# Altium PCB FT232B.PcbDoc
Units mm, origin at the board's own origin, x right, y up, seen from the top; angles counter-clockwise.
Board outline 24.13 x 41.15 mm, 2 copper layers (Top Layer, Bottom Layer); 21 components, 20 nets, 85 pads, 0 vias.
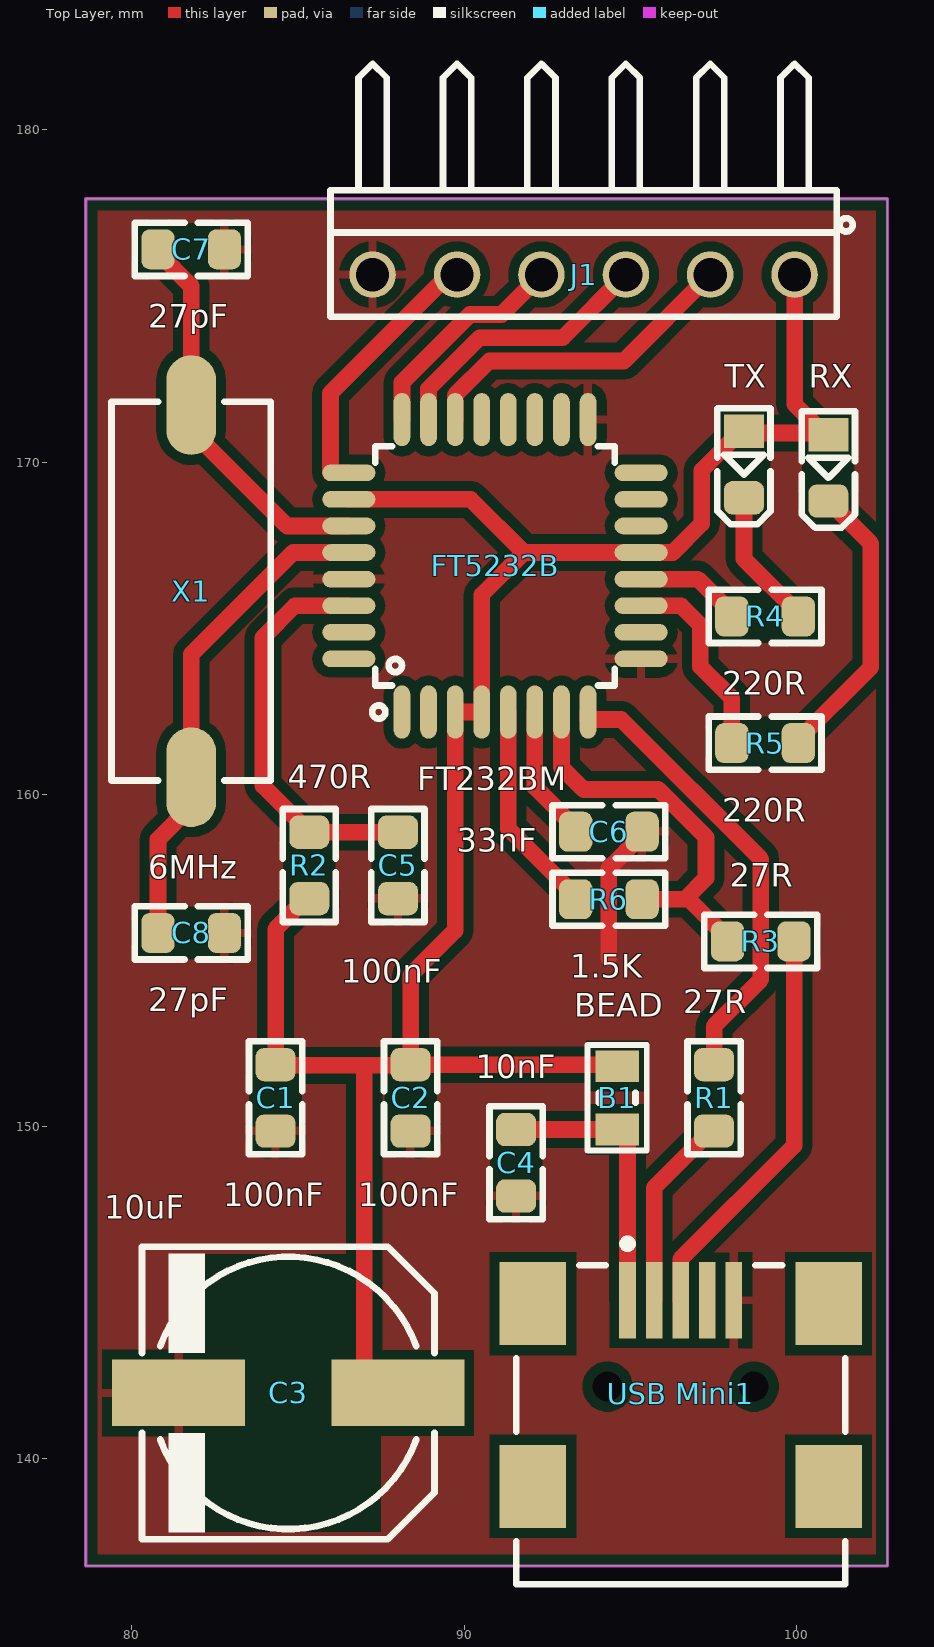
[diagram p0: Top Layer view]
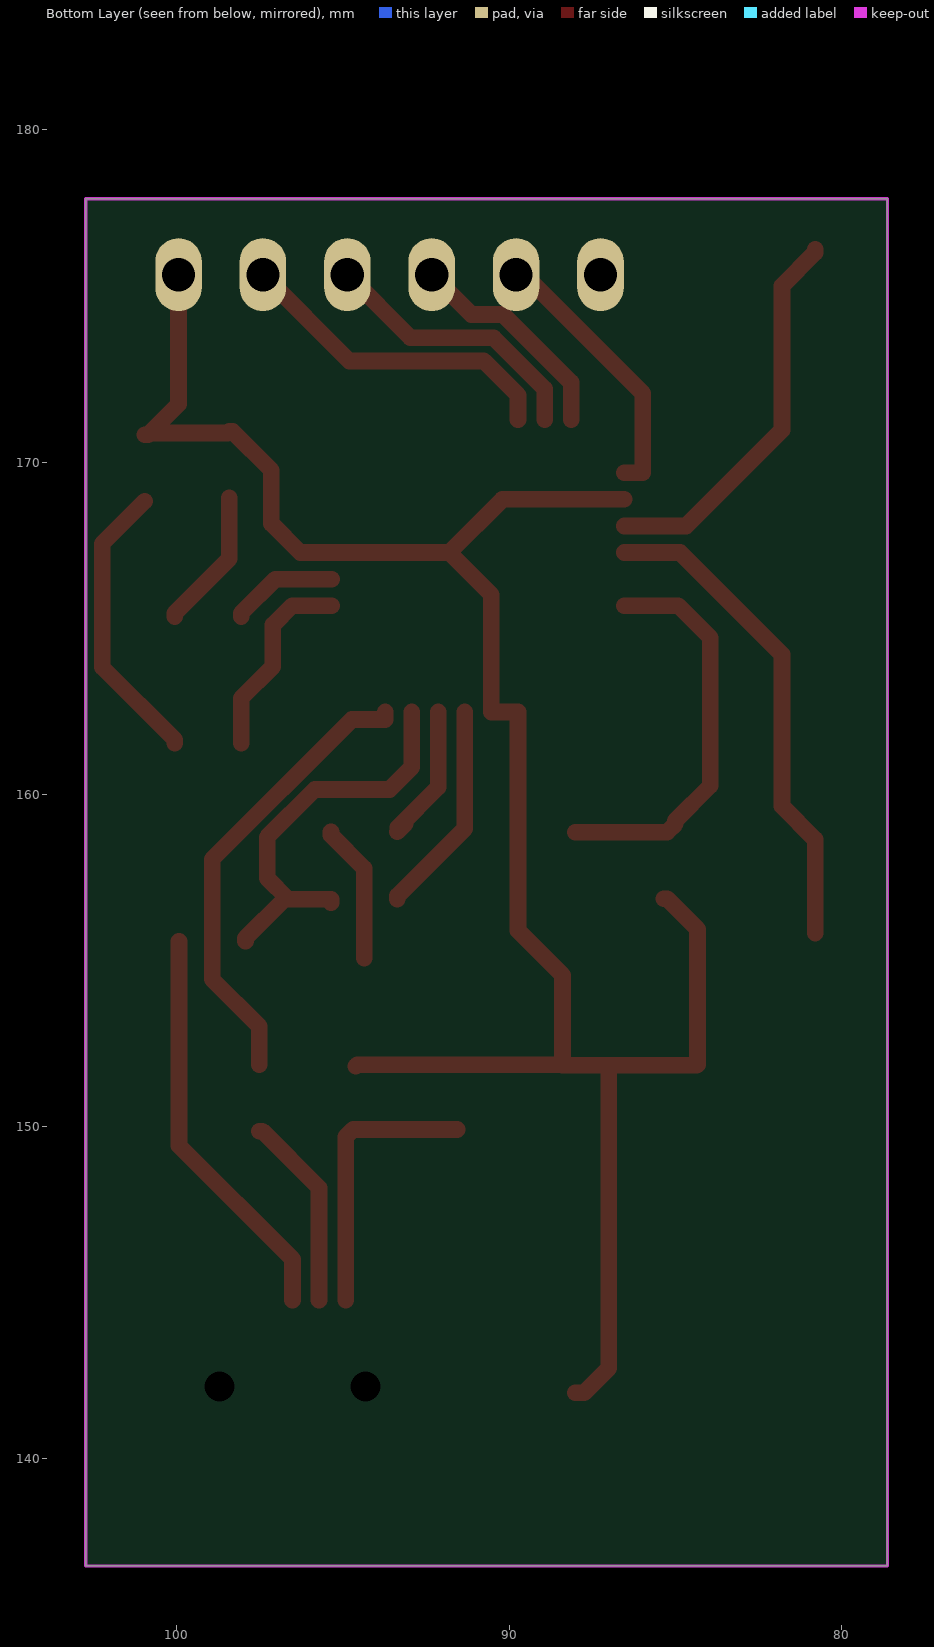
[diagram p1: Bottom Layer view, seen from below]

## Layer stack, top to bottom
Top Solder: solder mask 0.0102, Solder Resist, Dk 3.5
Top Layer: signal copper 0.0356
Dielectric 1: dielectric 0.32, FR-4, Dk 4.8
Bottom Layer: signal copper 0.0356
Bottom Solder: solder mask 0.0102, Solder Resist, Dk 3.5

## Board outline
78.613,136.779 78.613,177.927 102.743,177.927 102.743,136.779

## Design rules (kind name [scope] priority, off if disabled: settings)
Clearance Clearance_1 [InNamedPolygon('GND_L01_P000')] p1: gap=0.3 ignorepadtopadclearanceinfootprint=FALSE
Clearance [All] p2: gap=0.2 ignorepadtopadclearanceinfootprint=FALSE
PolygonConnect PolygonConnect_1 [All vs IsNamedPolygon('GND_L01_P000')] p1: connectstyle=Relief reliefconductorwidth=0.254 reliefentries=4 polygonreliefangle="90 Angle" airgapwidth=0.3
PolygonConnect [All] p2: connectstyle=Relief reliefconductorwidth=0.254 reliefentries=4 polygonreliefangle="90 Angle" airgapwidth=0.254
RoutingVias [All] p1: holewidth=0.711 width=1.27 viastyle="Through Hole" minholewidth=0.711 minwidth=1.27 maxholewidth=0.711 maxwidth=1.27
SolderMaskExpansion [All] p1: expansion=0.102 istentingtop=FALSE
Width [All] p1: maxlimit=1 minlimit=0.3 preferedwidth=0.5 minimp=50.000000 maximp=50.000000 favimp=50.000000
30 further rules are at their usual default settings.

## Components (designator, comment, footprint, x,y, rotation, side; value= is the part's Value field where it differs from the comment)
B1 "BEAD" "RES 0805 (2012X06L)" 94.61,150.04 r90 top
C1 "100nF" C0805 84.328,150.866 r270 top
C2 "100nF" C0805 88.392,150.866 r270 top
C3 "10uF" C_EL_8 84.709,141.986 r180 top
C4 "10nF" C0805 91.567,148.913 r90 top
C5 "100nF" C0805 88.011,157.861 r90 top
C6 "33nF" C0805 94.361,158.877 r0 top
C7 "27pF" C0805 81.788,176.403 r180 top
C8 "27pF" C0805 81.788,155.829 r180 top
FT5232B "FT232BM" QFG80_32 90.932,166.878 r90 top
J1 "HDR1X6" HDRR_M_1X6 93.599,175.641 r180 top value=HDRM6
R1 "27R" R0805 97.525,150.866 r270 top
R2 "470R" R0805 85.344,157.861 r270 top
R3 "27R" R0805 98.933,155.575 r0 top
R4 "220R" R0805 99.06,165.354 r0 top
R5 "220R" R0805 99.06,161.544 r0 top
R6 "1.5K" R0805 94.361,156.845 r0 top
RX "LED805BLU" LED0805BLU 100.965,169.826 r270 top
TX "LED805RED" LED0805RED 98.425,169.926 r270 top
"USB Mini1" "USB_Mini" USB_Mini.2 96.52,141.976 r270 top
X1 "6MHz" XTL_2_11X5 81.788,166.116 r90 top

## Footprints (in the part's own frame and the unit in brackets; to place one, negate y for a bottom-side part, rotate by r counter-clockwise, add the part's x,y. Pads: shape width x height; smd on the part's side, far side on the other; paste and mask are expansions set on the pad)
C0805 [mm] "CHIP Capacitor, 2.0X1.3mm, 0805"
  rrect50% 1x1.2 smd paste-5 mask+0.075: 1(-1,0) 2(1,0)
  Top Layer pour cut-out: -0.5,0.8 0.5,0.8 0.5,-0.8 -0.5,-0.8
  silkscreen extent -1.7,-0.8 1.7,0.8, body extent -1,-0.62 1,0.63, height 1
C_EL_8 [mm] "Electrolytic Cap, Size E, Size F, 8.3X10"
  rect 4x2 smd: 1(-3.3,0) 2(3.3,0)
  Top Layer pour cut-out: 2.794,4.191 2.794,-4.191 -2.794,-4.191 -2.794,4.191
  silkscreen extent -4.4,-4.4 4.4,4.4, body extent -4.9,-4.25 4.8,4.25, height 10.3
HDRR_M_1X6 [mm] "Connector; Header; 6 Position"
  round 1.4 / inner round 1.4 / far side oval 1.4x2.2 hole 1 mask+0.1: 1(-6.35,0) 2(-3.81,0) 3(-1.27,0) 4(1.27,0) 5(3.81,0) 6(6.35,0)
  silkscreen extent -8.1,-6.35 7.62,1.27, body extent -7.62,-7.35 7.62,1.27, height 5.45
LED0805BLU [mm] "LED SMD 0805, BLUE"
  rect 1x1.2 smd paste-2 mask+0.075: 1(-1,0)
  rrect50% 1x1.2 smd paste-2 mask+0.075: 2(1,0)
  Top Layer pour cut-out: -0.5,0.8 0.5,0.8 0.5,-0.8 -0.5,-0.8
  silkscreen extent -1.7,-0.8 1.8,0.8, body extent -1,-0.63 1,0.63, height 0.7
LED0805RED [mm] "LED SMD 0805, RED"
  rect 1x1.2 smd paste-2 mask+0.075: 1(-1,0)
  rrect50% 1x1.2 smd paste-2 mask+0.075: 2(1,0)
  Top Layer pour cut-out: -0.5,0.8 0.5,0.8 0.5,-0.8 -0.5,-0.8
  silkscreen extent -1.7,-0.8 1.8,0.8, body extent -1,-0.63 1,0.63, height 0.7
QFG80_32 [mm] "TQFP32, A32 (Cypress), GP32 (Zarlink), MS-026ABA(JEDEC), 7X7mm, 0.8mm"
  oval 1.6x0.5 smd: 1(-4.4,2.8) 2(-4.4,2) 3(-4.4,1.2) 4(-4.4,0.4) 5(-4.4,-0.4) 6(-4.4,-1.2) 7(-4.4,-2) 8(-4.4,-2.8) 17(4.4,-2.8) 18(4.4,-2) 19(4.4,-1.2) 20(4.4,-0.4) 21(4.4,0.4) 22(4.4,1.2) 23(4.4,2) 24(4.4,2.8)
  oval 0.5x1.6 smd: 9(-2.8,-4.4) 10(-2,-4.4) 11(-1.2,-4.4) 12(-0.4,-4.4) 13(0.4,-4.4) 14(1.2,-4.4) 15(2,-4.4) 16(2.8,-4.4) 25(2.8,4.4) 26(2,4.4) 27(1.2,4.4) 28(0.4,4.4) 29(-0.4,4.4) 30(-1.2,4.4) 31(-2,4.4) 32(-2.8,4.4)
  silkscreen extent -4.6,-3.6 3.6,3.7, body extent -4.5,-4.5 4.5,4.5, height 1.6
R0805 [mm] "CHIP RESISTOR 1/8 WATT ,2.0X1.3mm, 0805, 2012"
  rrect50% 1x1.2 smd paste-5 mask+0.075: 1(-1,0) 2(1,0)
  Top Layer pour cut-out: -0.5,0.8 0.5,0.8 0.5,-0.8 -0.5,-0.8
  silkscreen extent -1.7,-0.8 1.7,0.8, body extent -1.15,-0.67 1.15,0.68, height 0.76
"RES 0805 (2012X06L)" [mm] "Chip Resistor, 2-Leads, Body 2.0x1.3mm, IPC High Density _ (0.100 W)"
  rect 0.95x1.3 smd: 1(-0.127,0) 2(1.778,0)
  silkscreen extent -0.76,-0.89 2.41,0.89, body extent -0.19,-0.63 1.84,0.64, height 0.6
USB_Mini.2 [mm]
  rect 2.3x0.5 smd: 1(-2.8,-1.6) 2(-2.8,-0.8) 3(-2.8,0) 4(-2.8,0.8) 5(-2.8,1.6)
  rect 2.5x2 smd: 6(-2.7,4.45) 7(2.8,4.45) 8(-2.7,-4.45) 9(2.8,-4.45)
  round 0.6 hole 0.9 unplated: MH1(-0.2,2.2) MH2(-0.2,-2.2)
  silkscreen extent -4.62,-4.95 5.75,4.95, body extent -3.55,-5.64 45.39,5.16, height 5.8
XTL_2_11X5 [mm] "SMD crystal resonator, ABL, ABLS, HC-49, HC49 11X4.5MM"
  oval 3x1.5 smd: 1(-5.6,0) 2(5.6,0)
  silkscreen extent -5.7,-2.4 5.7,2.4, body extent -6.4,-2.41 6.4,2.42, height 4.3

## Part data
B1: library part "FERIT BEAD", "FERIT BEAD SMD 1206"
C1 C2 C4 C5 C6: library part CAP_SMD_MLCC_0805, "CAP, MLCC, -F, -V, MATERIAL, -%, 0201", ASSEMBLY=ASSEMBLY, MANF=-, MANF_P#=MANF_PART#, PARAM="-, -%", PARAM2=-V, PRICE="100= 1$"
C3: library part CAP_SMD_EL_8, "CAP, THD, ELEC,", ASSEMBLY=ASSEMBLY, DESC=DESCRIPTION, DIST#=MOUSER, MANF=MANF, MANF_P#=MANF_PART#, PARAM=20%, PARAM2=-V, PRICE="10= -$"
C7 C8: library part CAP_SMD_MLCC_0805, "CAP, MLCC", ASSEMBLY=ASSEMBLY, MANF=-, MANF_P#=MANF_PART#, PARAM="-, -%", PARAM2=-V, PRICE="100= 1$"
FT5232B: library part FT232BM_QFP32, "USB-UART", MANF=FTDI, MANF_P#=FT232BM
J1: library part HDRR_M_1X6, "CONN, HEADER, Male, pitch: 2.54mm, 6POS"
R1 R2 R3 R4 R5 R6: library part RES_SMD_0805, "RESISTOR, SMD", ASSEMBLY=ASSEMBLY, DESC=DESCRIPTION, DIST#=MOUSER, MANF=-, MANF_P#=-, PARAM=-W, PARAM2=1%, PRICE="100= 0.5$"
RX: library part LED_SMD_0805_BLU, "LED, SMD, 0805, BLUE", ASSEMBLY=ASSEMBLY, DESC=DESCRIPTION, MANF=MANF, MANF_P#=MANF_PART#, PARAM2=2.2V, PRICE=36t@Javan
TX: library part LED_SMD_0805_RED, "LED, SMD, 0805, RED", ASSEMBLY=ASSEMBLY, DESC=DESCRIPTION, MANF=MANF, MANF_P#=MANF_PART#, PARAM2=2.2V, PRICE=36t@Javan
"USB Mini1": "USB Mini", LatestRevisionDate=17-Jul-2002, LatestRevisionNote="Re-released for DXP Platform.", Publisher="Altium Limited"
X1: library part XTL_2_HC49_8MHz_SMD, "Crystal MOST POPULAR ABL HC49 PACKAGE", MANF=ABRACON, MANF_P#=ABLS-8.000MHZ-B4-T, PARAM="8MHz, 18pF, 30PPM, -20~70oC", PRICE=0.3$

## Nets (pads, with @x,y where several pads share a name; then routed paths per layer and width w, separated by ;. In a path a pad name is that pad's centre, name@x,y a point inside that pad or via, vN(x,y) a via of type N, cw(c..) or ccw(c..) an arc to the next point about the centre after c; other vN are vias at no path point)
CTS: FT5232B.22 J1.2 | length 9.9
  Top Layer w0.5: FT5232B.22 89.732,172.018 90.757,173.043 94.811,173.043 J1.2
D+: FT5232B.7 R3.1 R6.2 | length 12.3
  Top Layer w0.5: FT5232B.7 92.932,160.814 93.599,160.147 95.849,160.147 97.282,158.714 97.282,157.48 96.647,156.845 ; R6.2@95.361,156.745 R6.2 96.647,156.845 ; R3.1 97.933,155.675 96.763,156.845 96.647,156.845
D-: FT5232B.8 R1.1 | length 13.9
  Top Layer w0.5: FT5232B.8 93.732,162.254 94.732,162.254 98.933,158.053 98.933,154.432 97.525,153.024 R1.1
GND: "USB Mini1.5" C1.2 C2.2 C3.2 C4.1 C5.1 C6.2 C7.1 C8.1 FT5232B.9 FT5232B.17 FT5232B.29 J1.6 | length 4.2
  Top Layer w0.5: 94.361,155.067 94.361,157.777 95.361,158.777 C6.2
NetB1_1: "USB Mini1.1" B1.1 C4.2 | length 8.4
  Top Layer w0.5: C4.2 B1.1 94.695,149.913 94.92,149.688 94.92,144.776
NetC5_2: C5.2 FT5232B.30 R2.1 | length 12.1
  Top Layer w0.5: FT5232B.30 84.906,165.678 83.947,164.719 83.947,160.258 84.994,159.211 84.994,159.111 85.244,158.861 R2.1 C5.2
NetC6_1: C6.1 FT5232B.6 | length 4.3
  Top Layer w0.5: FT5232B.6 92.132,160.217 C6.1@93.345,159.004 ; C6.1@93.123,159.115 C6.1
NetC7_2: C7.2 FT5232B.27 X1.2 | length 11.8
  Top Layer w0.5: C7.2 80.788,176.303 81.788,175.303 X1.2 81.788,170.966 84.676,168.078 FT5232B.27
NetC8_2: C8.2 FT5232B.28 X1.1 | length 14.8
  Top Layer w0.5: C8.2 80.788,158.645 81.788,159.645 X1.1 81.788,164.211 84.855,167.278 FT5232B.28
NetFT5232B_5: FT5232B.5 R6.1 | length 6.5
  Top Layer w0.5: FT5232B.5 91.332,158.974 93.361,156.945 R6.1
NetFT5232B_11: FT5232B.11 R5.1 | length 6
  Top Layer w0.5: FT5232B.11 96.532,165.678 97.11,165.1 97.11,163.847 98.06,162.897 R5.1
NetFT5232B_12: FT5232B.12 R4.1 | length 3.3
  Top Layer w0.5: FT5232B.12 97.036,166.478 98.06,165.454 R4.1
NetR1_2: "USB Mini1.2" R1.2 | length 5.9
  Top Layer w0.5: 95.72,144.776 95.72,148.161 97.425,149.866 R1.2
NetR3_2: "USB Mini1.3" R3.2 | length 12.2
  Top Layer w0.5: 96.52,144.776 96.52,146.012 99.933,149.425 R3.2
NetR4_2: R4.2 TX.2 | length 4.2
  Top Layer w0.5: TX.2 98.425,167.089 100.06,165.454 R4.2
NetR5_2: R5.2 RX.2 | length 8.7
  Top Layer w0.5: R5.2 100.06,161.644 102.243,163.827 102.243,167.548 RX.2
RTS: FT5232B.23 J1.3 | length 8.3
  Top Layer w0.5: FT5232B.23 88.932,172.208 90.467,173.743 92.971,173.743 J1.3
RXD: FT5232B.24 J1.4 | length 6.7
  Top Layer w0.5: FT5232B.24 88.132,172.398 90.178,174.443 91.131,174.443 J1.4
TXD: FT5232B.25 J1.5 | length 8.2
  Top Layer w0.5: FT5232B.25 85.982,169.678 85.982,172.078 89.545,175.641 J1.5
VCC: B1.2 C1.1 C2.1 C3.1 FT5232B.3 FT5232B.4 FT5232B.13 FT5232B.26 J1.1 R2.2 RX.1 TX.1 | length 66.2
  Top Layer w0.5: R2.2 85.244,156.861 84.328,155.945 C1.1 84.352,151.842 86.995,151.842 ; FT5232B.26 90.202,168.878 91.802,167.278 ; C3.1 87.745,141.986 86.995,142.736 86.995,151.842 ; B1.2 94.562,151.866 C2.1 ; J1.1 99.949,171.742 RX.1@100.815,170.876 ; RX.1 100.865,170.826 RX.1@100.815,170.876 ; 86.995,151.842 88.392,151.842 C2.1 ; C2.1 88.392,154.559 89.732,155.899 FT5232B.3 FT5232B.4 90.532,166.008 91.802,167.278 ; 91.802,167.278 FT5232B.13 96.285,167.278 97.155,168.148 97.155,169.756 98.325,170.926 TX.1 98.475,170.876 RX.1@100.815,170.876
pads on no net: "USB Mini1.4" "USB Mini1.6" "USB Mini1.7" "USB Mini1.8" "USB Mini1.9" "USB Mini1.MH1" "USB Mini1.MH2" FT5232B.1 FT5232B.2 FT5232B.10 FT5232B.14 FT5232B.15 FT5232B.16 FT5232B.18 FT5232B.19 FT5232B.20 FT5232B.21 FT5232B.31 FT5232B.32

## Polygon pours and split planes (outlines as drawn)
GND on Top Layer "GND_L01_P000" (solid, pour order 0): 78.613,136.779 78.613,177.927 102.743,177.927 102.743,136.779

## Keep-outs
Keep-Out Layer:
  the board outline again, w0.1

## Text inside footprints (layer, text, board x,y; h text height)
"USB Mini1": Mechanical 1 "PCB Edge" at 92.484,136.493 h0.25